# Altium PCB nrf24l01_cell(P40).PcbDoc (part 1 of 11)
Units mm, origin at the board's own origin, x right, y up, seen from the top; angles counter-clockwise.
Board outline 136.2 x 112.2 mm, 2 copper layers (TopLayer, BottomLayer); 520 components, 0 nets, 2804 pads, 1040 vias.
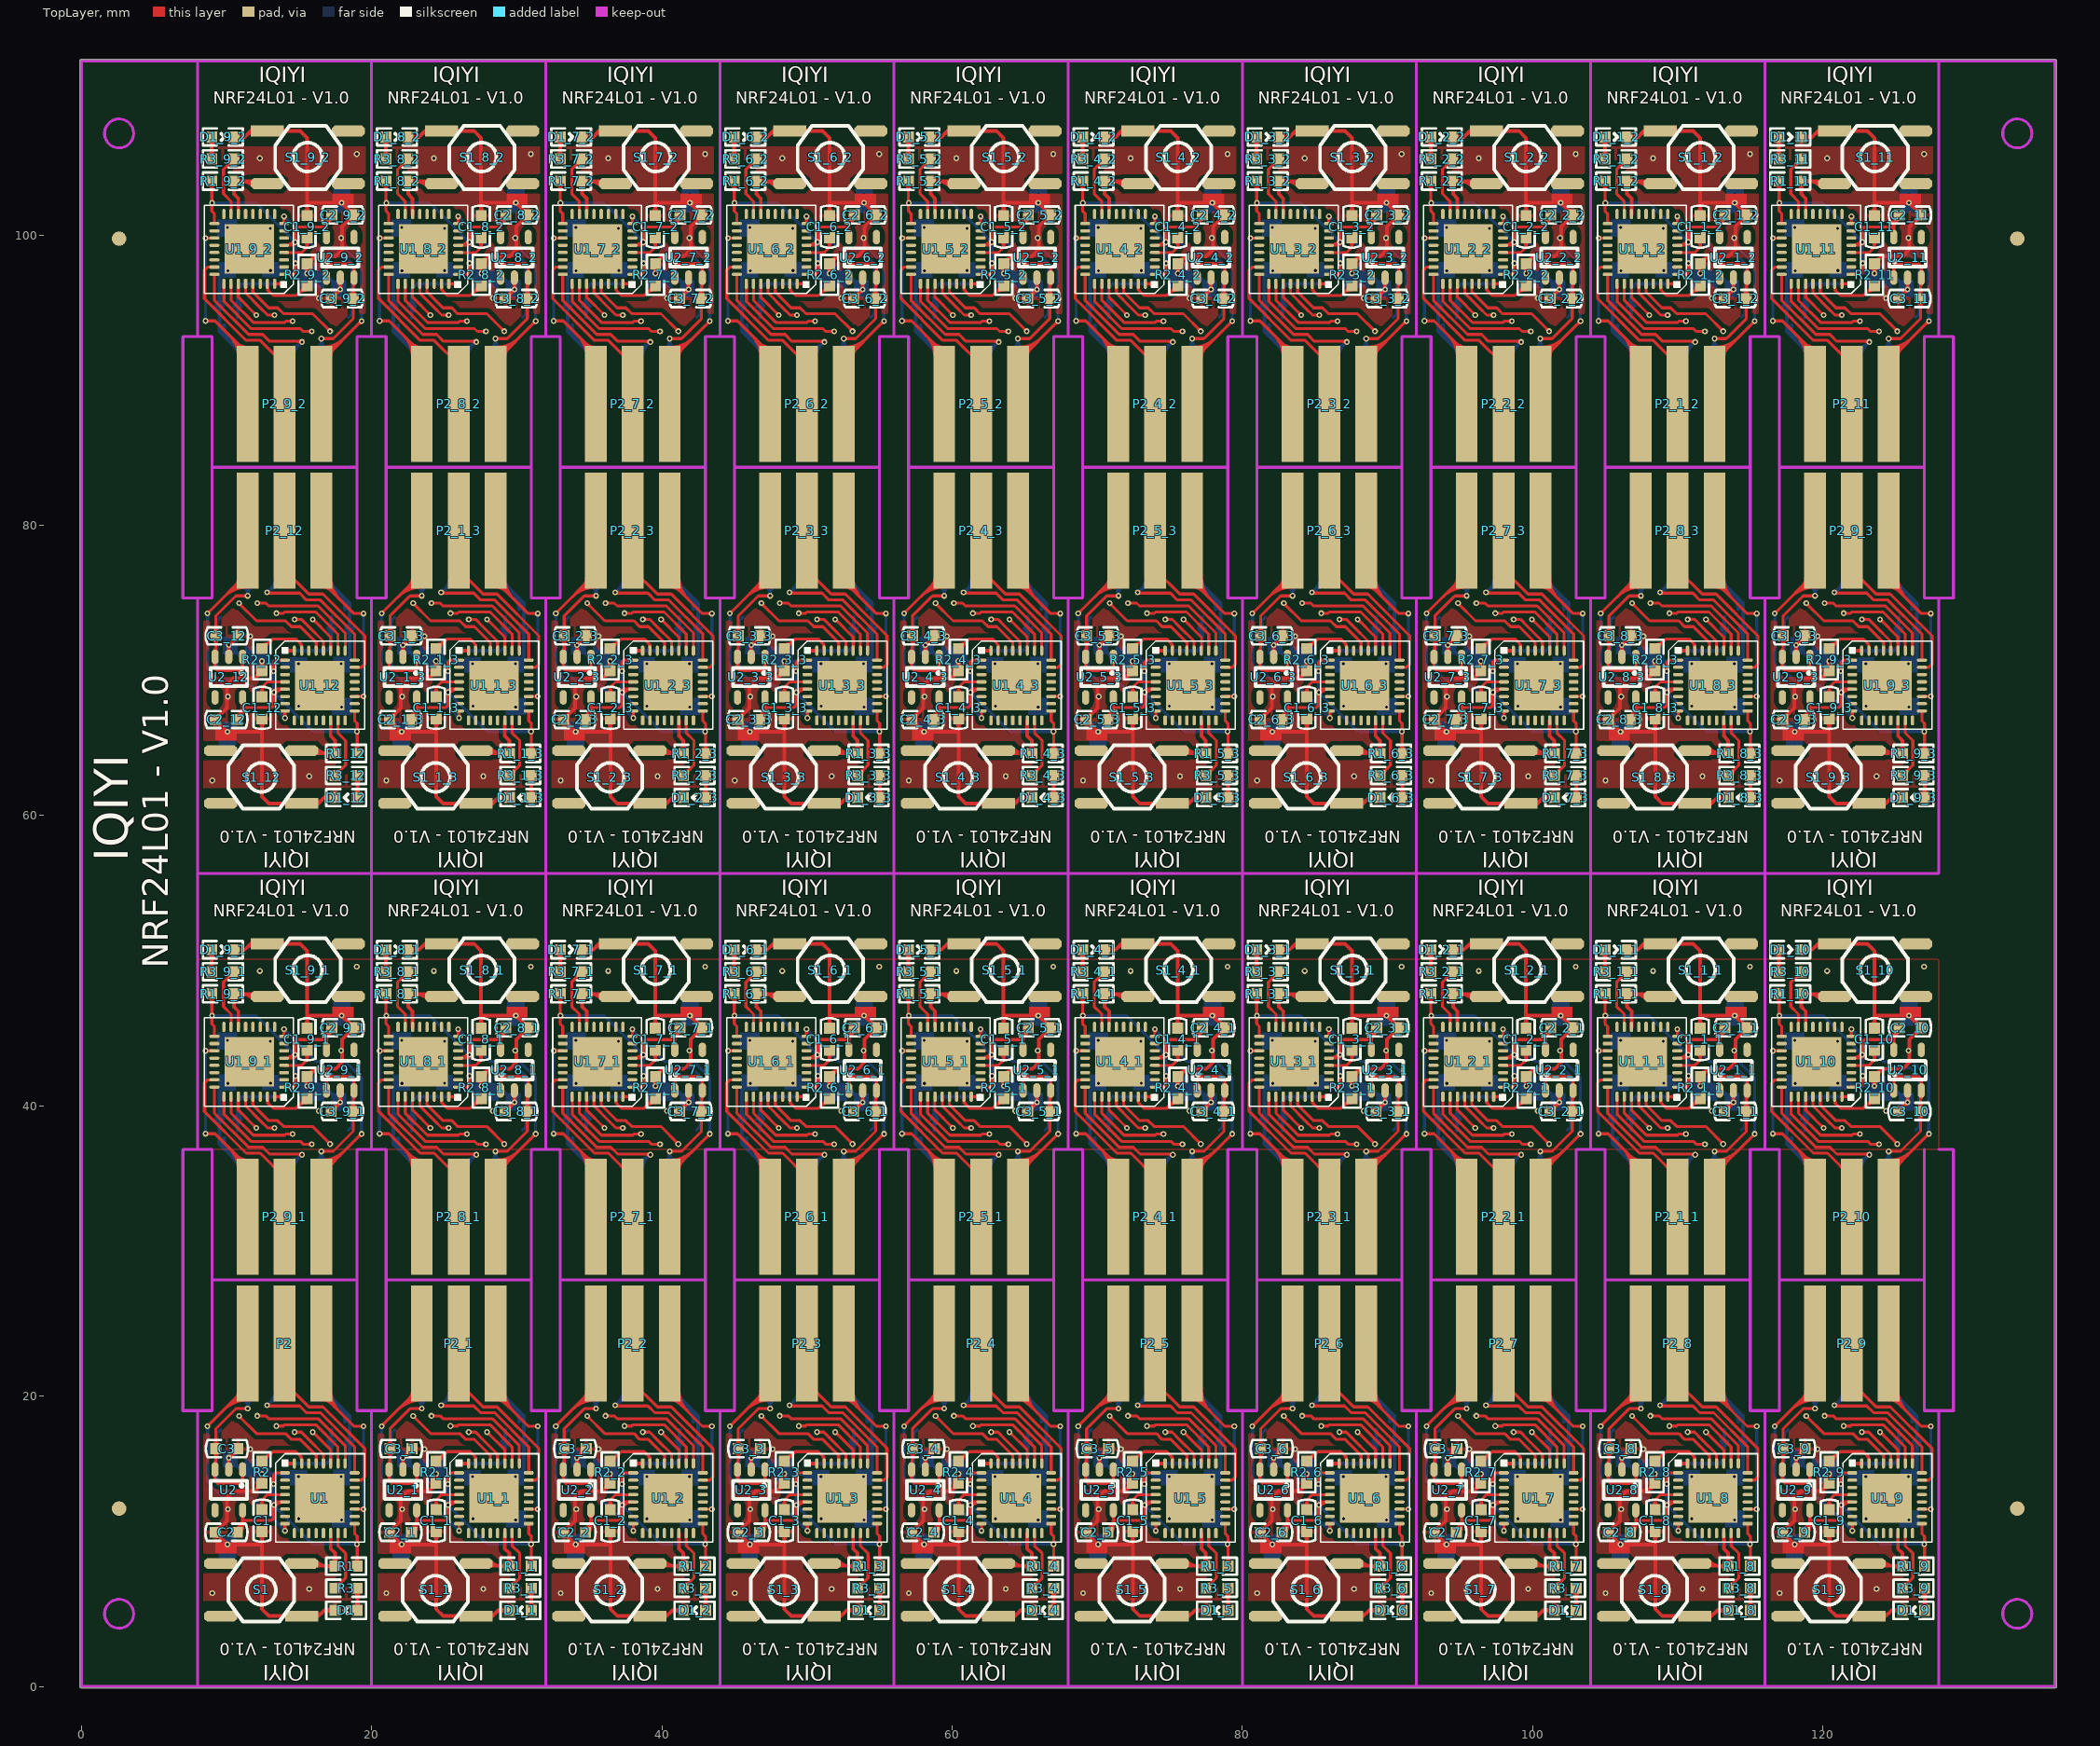
[diagram p0: TopLayer view]
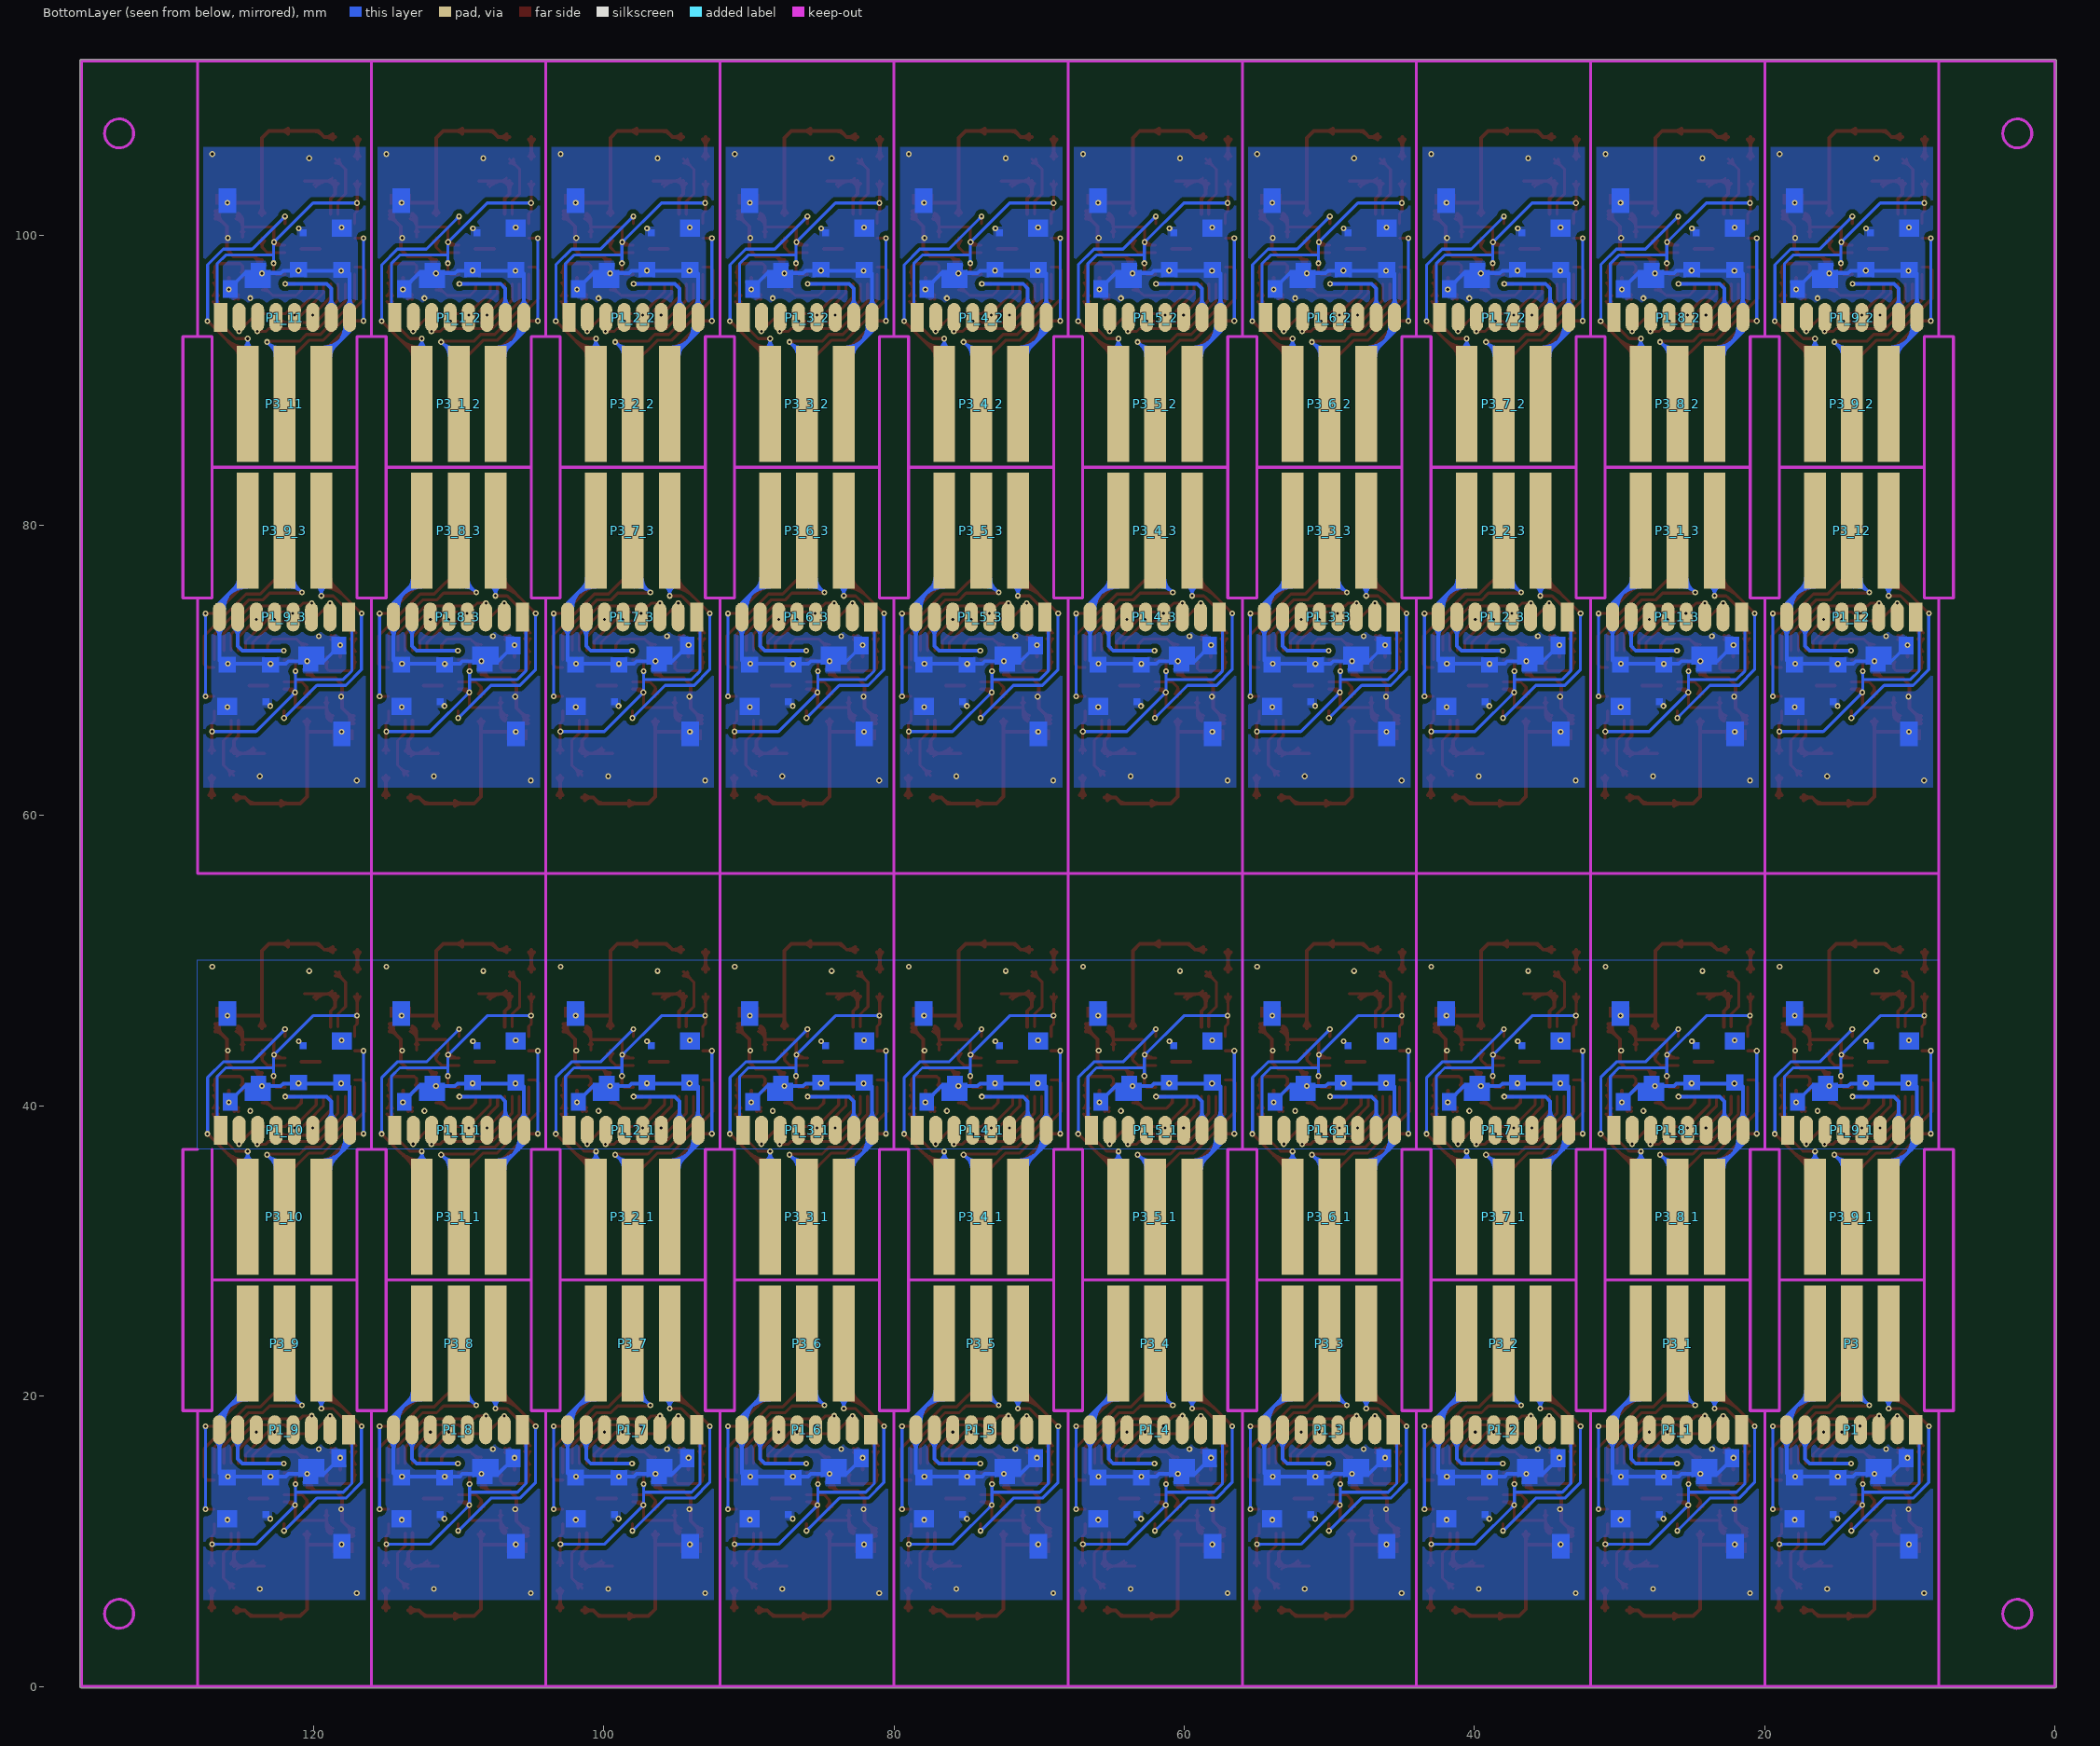
[diagram p1: BottomLayer view, seen from below]

## Layer stack, top to bottom
TopLayer: signal copper 0.0356
Dielectric: prepreg 0.32, FR-4, Dk 4.8
BottomLayer: signal copper 0.0356

## Board outline
-0.071,-0.071 cw(c0,0) -0.1,0 -0.1,112 cw(c0,112) 0,112.1 136,112.1 cw(c136,112) 136.1,112 136.1,0 cw(c136,0) 136.071,-0.071 cw(c136,0) 136,-0.1 ccw(c136,0) 136.071,-0.071 136,-0.1 0,-0.1 cw(c0,0)

## Design rules (kind name [scope] priority, off if disabled: settings)
Clearance Clearance_2 [All] p1 off: gap=0.3
Clearance Clearance_0 [All] p2: gap=0.203
ComponentClearance [All] p1: gap=0.1 collisioncheckmode=3 verticalgap=0.1 showdistances=FALSE
FabricationTestPointUsage TestPointUsage [All] p1: valid=0 allowmultiple=FALSE
FabricationTestpoint Testpoint [All] p1: side=3 testpointundercomponent=TRUE minsize=1.016 maxsize=2.54 preferedsize=1.524 minholesize=0.508 maxholesize=1.016 preferedholesize=0.813 testpointgrid=0.025 allowsidetop=TRUE allowsidebottom=TRUE usegrid=TRUE gridtolerance=0
PolygonConnect [All] p1: connectstyle=Relief reliefconductorwidth=0.254 reliefentries=4 polygonreliefangle="90 Angle"
RoutingVias [All] p1: holewidth=0.4 width=0.8 viastyle="Through Hole" minholewidth=0.2 minwidth=0.406 maxholewidth=0.711 maxwidth=1.27
SilkscreenOverComponentPads [All] p1: minsilkscreentomaskgap=0.254
SolderMaskExpansion [All] p1: expansion=0.102
Width [All] p1: maxlimit=5 minlimit=0.203 preferedwidth=0.203 minimp=50.000000 maximp=50.000000 favimp=50.000000
24 further rules are at their usual default settings.

## Classes and differential pairs
component class nrf24l01_mboard: C1 C2 C3 D1 P1 P2 P3 R1 R2 R3 S1 U1 U2

## Components (designator, comment, footprint, x,y, rotation, side; value= is the part's Value field where it differs from the comment)
C1 "104" 1608(0603C) 12.45,12.18 r270 top
C1_1 "104" 1608(0603C) 24.45,12.18 r270 top (schematic designator C1)
C1_1_1 "104" 1608(0603C) 111.55,43.82 r90 top (schematic designator C1)
C1_1_2 "104" 1608(0603C) 111.55,99.82 r90 top (schematic designator C1)
C1_1_3 "104" 1608(0603C) 24.45,68.18 r270 top (schematic designator C1)
C1_2 "104" 1608(0603C) 36.45,12.18 r270 top (schematic designator C1)
C1_2_1 "104" 1608(0603C) 99.55,43.82 r90 top (schematic designator C1)
C1_2_2 "104" 1608(0603C) 99.55,99.82 r90 top (schematic designator C1)
C1_2_3 "104" 1608(0603C) 36.45,68.18 r270 top (schematic designator C1)
C1_3 "104" 1608(0603C) 48.45,12.18 r270 top (schematic designator C1)
C1_3_1 "104" 1608(0603C) 87.55,43.82 r90 top (schematic designator C1)
C1_3_2 "104" 1608(0603C) 87.55,99.82 r90 top (schematic designator C1)
C1_3_3 "104" 1608(0603C) 48.45,68.18 r270 top (schematic designator C1)
C1_4 "104" 1608(0603C) 60.45,12.18 r270 top (schematic designator C1)
C1_4_1 "104" 1608(0603C) 75.55,43.82 r90 top (schematic designator C1)
C1_4_2 "104" 1608(0603C) 75.55,99.82 r90 top (schematic designator C1)
C1_4_3 "104" 1608(0603C) 60.45,68.18 r270 top (schematic designator C1)
C1_5 "104" 1608(0603C) 72.45,12.18 r270 top (schematic designator C1)
C1_5_1 "104" 1608(0603C) 63.55,43.82 r90 top (schematic designator C1)
C1_5_2 "104" 1608(0603C) 63.55,99.82 r90 top (schematic designator C1)
C1_5_3 "104" 1608(0603C) 72.45,68.18 r270 top (schematic designator C1)
C1_6 "104" 1608(0603C) 84.45,12.18 r270 top (schematic designator C1)
C1_6_1 "104" 1608(0603C) 51.55,43.82 r90 top (schematic designator C1)
C1_6_2 "104" 1608(0603C) 51.55,99.82 r90 top (schematic designator C1)
C1_6_3 "104" 1608(0603C) 84.45,68.18 r270 top (schematic designator C1)
C1_7 "104" 1608(0603C) 96.45,12.18 r270 top (schematic designator C1)
C1_7_1 "104" 1608(0603C) 39.55,43.82 r90 top (schematic designator C1)
C1_7_2 "104" 1608(0603C) 39.55,99.82 r90 top (schematic designator C1)
C1_7_3 "104" 1608(0603C) 96.45,68.18 r270 top (schematic designator C1)
C1_8 "104" 1608(0603C) 108.45,12.18 r270 top (schematic designator C1)
C1_8_1 "104" 1608(0603C) 27.55,43.82 r90 top (schematic designator C1)
C1_8_2 "104" 1608(0603C) 27.55,99.82 r90 top (schematic designator C1)
C1_8_3 "104" 1608(0603C) 108.45,68.18 r270 top (schematic designator C1)
C1_9 "104" 1608(0603C) 120.45,12.18 r270 top (schematic designator C1)
C1_9_1 "104" 1608(0603C) 15.55,43.82 r90 top (schematic designator C1)
C1_9_2 "104" 1608(0603C) 15.55,99.82 r90 top (schematic designator C1)
C1_9_3 "104" 1608(0603C) 120.45,68.18 r270 top (schematic designator C1)
C1_10 "104" 1608(0603C) 123.55,43.82 r90 top (schematic designator C1)
C1_11 "104" 1608(0603C) 123.55,99.82 r90 top (schematic designator C1)
C1_12 "104" 1608(0603C) 12.45,68.18 r270 top (schematic designator C1)
C2 "475" 1608(0603C) 10.75,10.62 r180 top
C2_1 "475" 1608(0603C) 22.75,10.62 r180 top (schematic designator C2)
C2_1_1 "475" 1608(0603C) 113.25,45.38 r0 top (schematic designator C2)
C2_1_2 "475" 1608(0603C) 113.25,101.38 r0 top (schematic designator C2)
C2_1_3 "475" 1608(0603C) 22.75,66.62 r180 top (schematic designator C2)
C2_2 "475" 1608(0603C) 34.75,10.62 r180 top (schematic designator C2)
C2_2_1 "475" 1608(0603C) 101.25,45.38 r0 top (schematic designator C2)
C2_2_2 "475" 1608(0603C) 101.25,101.38 r0 top (schematic designator C2)
C2_2_3 "475" 1608(0603C) 34.75,66.62 r180 top (schematic designator C2)
C2_3 "475" 1608(0603C) 46.75,10.62 r180 top (schematic designator C2)
C2_3_1 "475" 1608(0603C) 89.25,45.38 r0 top (schematic designator C2)
C2_3_2 "475" 1608(0603C) 89.25,101.38 r0 top (schematic designator C2)
C2_3_3 "475" 1608(0603C) 46.75,66.62 r180 top (schematic designator C2)
C2_4 "475" 1608(0603C) 58.75,10.62 r180 top (schematic designator C2)
C2_4_1 "475" 1608(0603C) 77.25,45.38 r0 top (schematic designator C2)
C2_4_2 "475" 1608(0603C) 77.25,101.38 r0 top (schematic designator C2)
C2_4_3 "475" 1608(0603C) 58.75,66.62 r180 top (schematic designator C2)
C2_5 "475" 1608(0603C) 70.75,10.62 r180 top (schematic designator C2)
C2_5_1 "475" 1608(0603C) 65.25,45.38 r0 top (schematic designator C2)
C2_5_2 "475" 1608(0603C) 65.25,101.38 r0 top (schematic designator C2)
C2_5_3 "475" 1608(0603C) 70.75,66.62 r180 top (schematic designator C2)
C2_6 "475" 1608(0603C) 82.75,10.62 r180 top (schematic designator C2)
C2_6_1 "475" 1608(0603C) 53.25,45.38 r0 top (schematic designator C2)
C2_6_2 "475" 1608(0603C) 53.25,101.38 r0 top (schematic designator C2)
C2_6_3 "475" 1608(0603C) 82.75,66.62 r180 top (schematic designator C2)
C2_7 "475" 1608(0603C) 94.75,10.62 r180 top (schematic designator C2)
C2_7_1 "475" 1608(0603C) 41.25,45.38 r0 top (schematic designator C2)
C2_7_2 "475" 1608(0603C) 41.25,101.38 r0 top (schematic designator C2)
C2_7_3 "475" 1608(0603C) 94.75,66.62 r180 top (schematic designator C2)
C2_8 "475" 1608(0603C) 106.75,10.62 r180 top (schematic designator C2)
C2_8_1 "475" 1608(0603C) 29.25,45.38 r0 top (schematic designator C2)
C2_8_2 "475" 1608(0603C) 29.25,101.38 r0 top (schematic designator C2)
C2_8_3 "475" 1608(0603C) 106.75,66.62 r180 top (schematic designator C2)
C2_9 "475" 1608(0603C) 118.75,10.62 r180 top (schematic designator C2)
C2_9_1 "475" 1608(0603C) 17.25,45.38 r0 top (schematic designator C2)
C2_9_2 "475" 1608(0603C) 17.25,101.38 r0 top (schematic designator C2)
C2_9_3 "475" 1608(0603C) 118.75,66.62 r180 top (schematic designator C2)
C2_10 "475" 1608(0603C) 125.25,45.38 r0 top (schematic designator C2)
C2_11 "475" 1608(0603C) 125.25,101.38 r0 top (schematic designator C2)
C2_12 "475" 1608(0603C) 10.75,66.62 r180 top (schematic designator C2)
C3 "104" 1608(0603C) 10.79,16.38 r180 top
C3_1 "104" 1608(0603C) 22.79,16.38 r180 top (schematic designator C3)
C3_1_1 "104" 1608(0603C) 113.21,39.62 r0 top (schematic designator C3)
C3_1_2 "104" 1608(0603C) 113.21,95.62 r0 top (schematic designator C3)
C3_1_3 "104" 1608(0603C) 22.79,72.38 r180 top (schematic designator C3)
C3_2 "104" 1608(0603C) 34.79,16.38 r180 top (schematic designator C3)
C3_2_1 "104" 1608(0603C) 101.21,39.62 r0 top (schematic designator C3)
C3_2_2 "104" 1608(0603C) 101.21,95.62 r0 top (schematic designator C3)
C3_2_3 "104" 1608(0603C) 34.79,72.38 r180 top (schematic designator C3)
C3_3 "104" 1608(0603C) 46.79,16.38 r180 top (schematic designator C3)
C3_3_1 "104" 1608(0603C) 89.21,39.62 r0 top (schematic designator C3)
C3_3_2 "104" 1608(0603C) 89.21,95.62 r0 top (schematic designator C3)
C3_3_3 "104" 1608(0603C) 46.79,72.38 r180 top (schematic designator C3)
C3_4 "104" 1608(0603C) 58.79,16.38 r180 top (schematic designator C3)
C3_4_1 "104" 1608(0603C) 77.21,39.62 r0 top (schematic designator C3)
C3_4_2 "104" 1608(0603C) 77.21,95.62 r0 top (schematic designator C3)
C3_4_3 "104" 1608(0603C) 58.79,72.38 r180 top (schematic designator C3)
C3_5 "104" 1608(0603C) 70.79,16.38 r180 top (schematic designator C3)
C3_5_1 "104" 1608(0603C) 65.21,39.62 r0 top (schematic designator C3)
C3_5_2 "104" 1608(0603C) 65.21,95.62 r0 top (schematic designator C3)
C3_5_3 "104" 1608(0603C) 70.79,72.38 r180 top (schematic designator C3)
C3_6 "104" 1608(0603C) 82.79,16.38 r180 top (schematic designator C3)
C3_6_1 "104" 1608(0603C) 53.21,39.62 r0 top (schematic designator C3)
C3_6_2 "104" 1608(0603C) 53.21,95.62 r0 top (schematic designator C3)
C3_6_3 "104" 1608(0603C) 82.79,72.38 r180 top (schematic designator C3)
C3_7 "104" 1608(0603C) 94.79,16.38 r180 top (schematic designator C3)
C3_7_1 "104" 1608(0603C) 41.21,39.62 r0 top (schematic designator C3)
C3_7_2 "104" 1608(0603C) 41.21,95.62 r0 top (schematic designator C3)
C3_7_3 "104" 1608(0603C) 94.79,72.38 r180 top (schematic designator C3)
C3_8 "104" 1608(0603C) 106.79,16.38 r180 top (schematic designator C3)
C3_8_1 "104" 1608(0603C) 29.21,39.62 r0 top (schematic designator C3)
C3_8_2 "104" 1608(0603C) 29.21,95.62 r0 top (schematic designator C3)
C3_8_3 "104" 1608(0603C) 106.79,72.38 r180 top (schematic designator C3)
C3_9 "104" 1608(0603C) 118.79,16.38 r180 top (schematic designator C3)
C3_9_1 "104" 1608(0603C) 17.21,39.62 r0 top (schematic designator C3)
C3_9_2 "104" 1608(0603C) 17.21,95.62 r0 top (schematic designator C3)
C3_9_3 "104" 1608(0603C) 118.79,72.38 r180 top (schematic designator C3)
C3_10 "104" 1608(0603C) 125.21,39.62 r0 top (schematic designator C3)
C3_11 "104" 1608(0603C) 125.21,95.62 r0 top (schematic designator C3)
C3_12 "104" 1608(0603C) 10.79,72.38 r180 top (schematic designator C3)
D1 "LED_RED" LED-0603R 17.49,5.24 r0 top
D1_1 "LED_RED" LED-0603R 29.49,5.24 r0 top (schematic designator D1)
D1_1_1 "LED_RED" LED-0603R 106.51,50.76 r180 top (schematic designator D1)
D1_1_2 "LED_RED" LED-0603R 106.51,106.76 r180 top (schematic designator D1)
D1_1_3 "LED_RED" LED-0603R 29.49,61.24 r0 top (schematic designator D1)
D1_2 "LED_RED" LED-0603R 41.49,5.24 r0 top (schematic designator D1)
D1_2_1 "LED_RED" LED-0603R 94.51,50.76 r180 top (schematic designator D1)
D1_2_2 "LED_RED" LED-0603R 94.51,106.76 r180 top (schematic designator D1)
D1_2_3 "LED_RED" LED-0603R 41.49,61.24 r0 top (schematic designator D1)
D1_3 "LED_RED" LED-0603R 53.49,5.24 r0 top (schematic designator D1)
D1_3_1 "LED_RED" LED-0603R 82.51,50.76 r180 top (schematic designator D1)
D1_3_2 "LED_RED" LED-0603R 82.51,106.76 r180 top (schematic designator D1)
D1_3_3 "LED_RED" LED-0603R 53.49,61.24 r0 top (schematic designator D1)
D1_4 "LED_RED" LED-0603R 65.49,5.24 r0 top (schematic designator D1)
D1_4_1 "LED_RED" LED-0603R 70.51,50.76 r180 top (schematic designator D1)
D1_4_2 "LED_RED" LED-0603R 70.51,106.76 r180 top (schematic designator D1)
D1_4_3 "LED_RED" LED-0603R 65.49,61.24 r0 top (schematic designator D1)
D1_5 "LED_RED" LED-0603R 77.49,5.24 r0 top (schematic designator D1)
D1_5_1 "LED_RED" LED-0603R 58.51,50.76 r180 top (schematic designator D1)
D1_5_2 "LED_RED" LED-0603R 58.51,106.76 r180 top (schematic designator D1)
D1_5_3 "LED_RED" LED-0603R 77.49,61.24 r0 top (schematic designator D1)
D1_6 "LED_RED" LED-0603R 89.49,5.24 r0 top (schematic designator D1)
D1_6_1 "LED_RED" LED-0603R 46.51,50.76 r180 top (schematic designator D1)
D1_6_2 "LED_RED" LED-0603R 46.51,106.76 r180 top (schematic designator D1)
D1_6_3 "LED_RED" LED-0603R 89.49,61.24 r0 top (schematic designator D1)
D1_7 "LED_RED" LED-0603R 101.49,5.24 r0 top (schematic designator D1)
D1_7_1 "LED_RED" LED-0603R 34.51,50.76 r180 top (schematic designator D1)
D1_7_2 "LED_RED" LED-0603R 34.51,106.76 r180 top (schematic designator D1)
D1_7_3 "LED_RED" LED-0603R 101.49,61.24 r0 top (schematic designator D1)
D1_8 "LED_RED" LED-0603R 113.49,5.24 r0 top (schematic designator D1)
D1_8_1 "LED_RED" LED-0603R 22.51,50.76 r180 top (schematic designator D1)
D1_8_2 "LED_RED" LED-0603R 22.51,106.76 r180 top (schematic designator D1)
D1_8_3 "LED_RED" LED-0603R 113.49,61.24 r0 top (schematic designator D1)
D1_9 "LED_RED" LED-0603R 125.49,5.24 r0 top (schematic designator D1)
D1_9_1 "LED_RED" LED-0603R 10.51,50.76 r180 top (schematic designator D1)
D1_9_2 "LED_RED" LED-0603R 10.51,106.76 r180 top (schematic designator D1)
D1_9_3 "LED_RED" LED-0603R 125.49,61.24 r0 top (schematic designator D1)
D1_10 "LED_RED" LED-0603R 118.51,50.76 r180 top (schematic designator D1)
D1_11 "LED_RED" LED-0603R 118.51,106.76 r180 top (schematic designator D1)
D1_12 "LED_RED" LED-0603R 17.49,61.24 r0 top (schematic designator D1)
P1 "NRF24L01" SSSIP8X_N 9.6,17.68 r270 bottom
P1_1 "NRF24L01" SSSIP8X_N 21.6,17.68 r270 bottom (schematic designator P1)
P1_1_1 "NRF24L01" SSSIP8X_N 114.4,38.32 r90 bottom (schematic designator P1)
P1_1_2 "NRF24L01" SSSIP8X_N 114.4,94.32 r90 bottom (schematic designator P1)
P1_1_3 "NRF24L01" SSSIP8X_N 21.6,73.68 r270 bottom (schematic designator P1)
P1_2 "NRF24L01" SSSIP8X_N 33.6,17.68 r270 bottom (schematic designator P1)
P1_2_1 "NRF24L01" SSSIP8X_N 102.4,38.32 r90 bottom (schematic designator P1)
P1_2_2 "NRF24L01" SSSIP8X_N 102.4,94.32 r90 bottom (schematic designator P1)
P1_2_3 "NRF24L01" SSSIP8X_N 33.6,73.68 r270 bottom (schematic designator P1)
P1_3 "NRF24L01" SSSIP8X_N 45.6,17.68 r270 bottom (schematic designator P1)
P1_3_1 "NRF24L01" SSSIP8X_N 90.4,38.32 r90 bottom (schematic designator P1)
P1_3_2 "NRF24L01" SSSIP8X_N 90.4,94.32 r90 bottom (schematic designator P1)
P1_3_3 "NRF24L01" SSSIP8X_N 45.6,73.68 r270 bottom (schematic designator P1)
P1_4 "NRF24L01" SSSIP8X_N 57.6,17.68 r270 bottom (schematic designator P1)
P1_4_1 "NRF24L01" SSSIP8X_N 78.4,38.32 r90 bottom (schematic designator P1)
P1_4_2 "NRF24L01" SSSIP8X_N 78.4,94.32 r90 bottom (schematic designator P1)
P1_4_3 "NRF24L01" SSSIP8X_N 57.6,73.68 r270 bottom (schematic designator P1)
P1_5 "NRF24L01" SSSIP8X_N 69.6,17.68 r270 bottom (schematic designator P1)
P1_5_1 "NRF24L01" SSSIP8X_N 66.4,38.32 r90 bottom (schematic designator P1)
P1_5_2 "NRF24L01" SSSIP8X_N 66.4,94.32 r90 bottom (schematic designator P1)
P1_5_3 "NRF24L01" SSSIP8X_N 69.6,73.68 r270 bottom (schematic designator P1)
P1_6 "NRF24L01" SSSIP8X_N 81.6,17.68 r270 bottom (schematic designator P1)
P1_6_1 "NRF24L01" SSSIP8X_N 54.4,38.32 r90 bottom (schematic designator P1)
P1_6_2 "NRF24L01" SSSIP8X_N 54.4,94.32 r90 bottom (schematic designator P1)
P1_6_3 "NRF24L01" SSSIP8X_N 81.6,73.68 r270 bottom (schematic designator P1)
P1_7 "NRF24L01" SSSIP8X_N 93.6,17.68 r270 bottom (schematic designator P1)
P1_7_1 "NRF24L01" SSSIP8X_N 42.4,38.32 r90 bottom (schematic designator P1)
P1_7_2 "NRF24L01" SSSIP8X_N 42.4,94.32 r90 bottom (schematic designator P1)
P1_7_3 "NRF24L01" SSSIP8X_N 93.6,73.68 r270 bottom (schematic designator P1)
P1_8 "NRF24L01" SSSIP8X_N 105.6,17.68 r270 bottom (schematic designator P1)
P1_8_1 "NRF24L01" SSSIP8X_N 30.4,38.32 r90 bottom (schematic designator P1)
P1_8_2 "NRF24L01" SSSIP8X_N 30.4,94.32 r90 bottom (schematic designator P1)
P1_8_3 "NRF24L01" SSSIP8X_N 105.6,73.68 r270 bottom (schematic designator P1)
P1_9 "NRF24L01" SSSIP8X_N 117.6,17.68 r270 bottom (schematic designator P1)
P1_9_1 "NRF24L01" SSSIP8X_N 18.4,38.32 r90 bottom (schematic designator P1)
P1_9_2 "NRF24L01" SSSIP8X_N 18.4,94.32 r90 bottom (schematic designator P1)
P1_9_3 "NRF24L01" SSSIP8X_N 117.6,73.68 r270 bottom (schematic designator P1)
P1_10 "NRF24L01" SSSIP8X_N 126.4,38.32 r90 bottom (schematic designator P1)
P1_11 "NRF24L01" SSSIP8X_N 126.4,94.32 r90 bottom (schematic designator P1)
P1_12 "NRF24L01" SSSIP8X_N 9.6,73.68 r270 bottom (schematic designator P1)
P2 "" SIPP3X 16.54,23.63 r180 top
P2_1 "" SIPP3X 28.54,23.63 r180 top (schematic designator P2)
P2_1_1 "" SIPP3X 107.46,32.37 r0 top (schematic designator P2)
P2_1_2 "" SIPP3X 107.46,88.37 r0 top (schematic designator P2)
P2_1_3 "" SIPP3X 28.54,79.63 r180 top (schematic designator P2)
P2_2 "" SIPP3X 40.54,23.63 r180 top (schematic designator P2)
P2_2_1 "" SIPP3X 95.46,32.37 r0 top (schematic designator P2)
P2_2_2 "" SIPP3X 95.46,88.37 r0 top (schematic designator P2)
P2_2_3 "" SIPP3X 40.54,79.63 r180 top (schematic designator P2)
P2_3 "" SIPP3X 52.54,23.63 r180 top (schematic designator P2)
P2_3_1 "" SIPP3X 83.46,32.37 r0 top (schematic designator P2)
P2_3_2 "" SIPP3X 83.46,88.37 r0 top (schematic designator P2)
P2_3_3 "" SIPP3X 52.54,79.63 r180 top (schematic designator P2)
P2_4 "" SIPP3X 64.54,23.63 r180 top (schematic designator P2)
P2_4_1 "" SIPP3X 71.46,32.37 r0 top (schematic designator P2)
P2_4_2 "" SIPP3X 71.46,88.37 r0 top (schematic designator P2)
P2_4_3 "" SIPP3X 64.54,79.63 r180 top (schematic designator P2)
P2_5 "" SIPP3X 76.54,23.63 r180 top (schematic designator P2)
P2_5_1 "" SIPP3X 59.46,32.37 r0 top (schematic designator P2)
P2_5_2 "" SIPP3X 59.46,88.37 r0 top (schematic designator P2)
P2_5_3 "" SIPP3X 76.54,79.63 r180 top (schematic designator P2)
P2_6 "" SIPP3X 88.54,23.63 r180 top (schematic designator P2)
P2_6_1 "" SIPP3X 47.46,32.37 r0 top (schematic designator P2)
P2_6_2 "" SIPP3X 47.46,88.37 r0 top (schematic designator P2)
P2_6_3 "" SIPP3X 88.54,79.63 r180 top (schematic designator P2)
P2_7 "" SIPP3X 100.54,23.63 r180 top (schematic designator P2)
P2_7_1 "" SIPP3X 35.46,32.37 r0 top (schematic designator P2)
P2_7_2 "" SIPP3X 35.46,88.37 r0 top (schematic designator P2)
P2_7_3 "" SIPP3X 100.54,79.63 r180 top (schematic designator P2)
P2_8 "" SIPP3X 112.54,23.63 r180 top (schematic designator P2)
P2_8_1 "" SIPP3X 23.46,32.37 r0 top (schematic designator P2)
P2_8_2 "" SIPP3X 23.46,88.37 r0 top (schematic designator P2)
P2_8_3 "" SIPP3X 112.54,79.63 r180 top (schematic designator P2)
P2_9 "" SIPP3X 124.54,23.63 r180 top (schematic designator P2)
P2_9_1 "" SIPP3X 11.46,32.37 r0 top (schematic designator P2)
P2_9_2 "" SIPP3X 11.46,88.37 r0 top (schematic designator P2)
P2_9_3 "" SIPP3X 124.54,79.63 r180 top (schematic designator P2)
P2_10 "" SIPP3X 119.46,32.37 r0 top (schematic designator P2)
P2_11 "" SIPP3X 119.46,88.37 r0 top (schematic designator P2)
P2_12 "" SIPP3X 16.54,79.63 r180 top (schematic designator P2)
P3 "" SIPP3X 16.54,23.63 r180 bottom
P3_1 "" SIPP3X 28.54,23.63 r180 bottom (schematic designator P3)
P3_1_1 "" SIPP3X 107.46,32.37 r0 bottom (schematic designator P3)
P3_1_2 "" SIPP3X 107.46,88.37 r0 bottom (schematic designator P3)
P3_1_3 "" SIPP3X 28.54,79.63 r180 bottom (schematic designator P3)
P3_2 "" SIPP3X 40.54,23.63 r180 bottom (schematic designator P3)
P3_2_1 "" SIPP3X 95.46,32.37 r0 bottom (schematic designator P3)
P3_2_2 "" SIPP3X 95.46,88.37 r0 bottom (schematic designator P3)
P3_2_3 "" SIPP3X 40.54,79.63 r180 bottom (schematic designator P3)
P3_3 "" SIPP3X 52.54,23.63 r180 bottom (schematic designator P3)
P3_3_1 "" SIPP3X 83.46,32.37 r0 bottom (schematic designator P3)
P3_3_2 "" SIPP3X 83.46,88.37 r0 bottom (schematic designator P3)
P3_3_3 "" SIPP3X 52.54,79.63 r180 bottom (schematic designator P3)
P3_4 "" SIPP3X 64.54,23.63 r180 bottom (schematic designator P3)
P3_4_1 "" SIPP3X 71.46,32.37 r0 bottom (schematic designator P3)
P3_4_2 "" SIPP3X 71.46,88.37 r0 bottom (schematic designator P3)
P3_4_3 "" SIPP3X 64.54,79.63 r180 bottom (schematic designator P3)
P3_5 "" SIPP3X 76.54,23.63 r180 bottom (schematic designator P3)
P3_5_1 "" SIPP3X 59.46,32.37 r0 bottom (schematic designator P3)
P3_5_2 "" SIPP3X 59.46,88.37 r0 bottom (schematic designator P3)
P3_5_3 "" SIPP3X 76.54,79.63 r180 bottom (schematic designator P3)
P3_6 "" SIPP3X 88.54,23.63 r180 bottom (schematic designator P3)
P3_6_1 "" SIPP3X 47.46,32.37 r0 bottom (schematic designator P3)
P3_6_2 "" SIPP3X 47.46,88.37 r0 bottom (schematic designator P3)
P3_6_3 "" SIPP3X 88.54,79.63 r180 bottom (schematic designator P3)
P3_7 "" SIPP3X 100.54,23.63 r180 bottom (schematic designator P3)
P3_7_1 "" SIPP3X 35.46,32.37 r0 bottom (schematic designator P3)
P3_7_2 "" SIPP3X 35.46,88.37 r0 bottom (schematic designator P3)
P3_7_3 "" SIPP3X 100.54,79.63 r180 bottom (schematic designator P3)
P3_8 "" SIPP3X 112.54,23.63 r180 bottom (schematic designator P3)
P3_8_1 "" SIPP3X 23.46,32.37 r0 bottom (schematic designator P3)
P3_8_2 "" SIPP3X 23.46,88.37 r0 bottom (schematic designator P3)
P3_8_3 "" SIPP3X 112.54,79.63 r180 bottom (schematic designator P3)
P3_9 "" SIPP3X 124.54,23.63 r180 bottom (schematic designator P3)
P3_9_1 "" SIPP3X 11.46,32.37 r0 bottom (schematic designator P3)
P3_9_2 "" SIPP3X 11.46,88.37 r0 bottom (schematic designator P3)
P3_9_3 "" SIPP3X 124.54,79.63 r180 bottom (schematic designator P3)
P3_10 "" SIPP3X 119.46,32.37 r0 bottom (schematic designator P3)
P3_11 "" SIPP3X 119.46,88.37 r0 bottom (schematic designator P3)
P3_12 "" SIPP3X 16.54,79.63 r180 bottom (schematic designator P3)
R1 "10K" 1608(0603R) 19.01,8.28 r180 top
R1_1 "10K" 1608(0603R) 31.01,8.28 r180 top (schematic designator R1)
R1_1_1 "10K" 1608(0603R) 104.99,47.72 r0 top (schematic designator R1)
R1_1_2 "10K" 1608(0603R) 104.99,103.72 r0 top (schematic designator R1)
R1_1_3 "10K" 1608(0603R) 31.01,64.28 r180 top (schematic designator R1)
R1_2 "10K" 1608(0603R) 43.01,8.28 r180 top (schematic designator R1)
R1_2_1 "10K" 1608(0603R) 92.99,47.72 r0 top (schematic designator R1)
R1_2_2 "10K" 1608(0603R) 92.99,103.72 r0 top (schematic designator R1)
R1_2_3 "10K" 1608(0603R) 43.01,64.28 r180 top (schematic designator R1)
R1_3 "10K" 1608(0603R) 55.01,8.28 r180 top (schematic designator R1)
R1_3_1 "10K" 1608(0603R) 80.99,47.72 r0 top (schematic designator R1)
R1_3_2 "10K" 1608(0603R) 80.99,103.72 r0 top (schematic designator R1)
R1_3_3 "10K" 1608(0603R) 55.01,64.28 r180 top (schematic designator R1)
R1_4 "10K" 1608(0603R) 67.01,8.28 r180 top (schematic designator R1)
R1_4_1 "10K" 1608(0603R) 68.99,47.72 r0 top (schematic designator R1)
R1_4_2 "10K" 1608(0603R) 68.99,103.72 r0 top (schematic designator R1)
R1_4_3 "10K" 1608(0603R) 67.01,64.28 r180 top (schematic designator R1)
R1_5 "10K" 1608(0603R) 79.01,8.28 r180 top (schematic designator R1)
R1_5_1 "10K" 1608(0603R) 56.99,47.72 r0 top (schematic designator R1)
R1_5_2 "10K" 1608(0603R) 56.99,103.72 r0 top (schematic designator R1)
R1_5_3 "10K" 1608(0603R) 79.01,64.28 r180 top (schematic designator R1)
R1_6 "10K" 1608(0603R) 91.01,8.28 r180 top (schematic designator R1)
R1_6_1 "10K" 1608(0603R) 44.99,47.72 r0 top (schematic designator R1)
R1_6_2 "10K" 1608(0603R) 44.99,103.72 r0 top (schematic designator R1)
R1_6_3 "10K" 1608(0603R) 91.01,64.28 r180 top (schematic designator R1)
R1_7 "10K" 1608(0603R) 103.01,8.28 r180 top (schematic designator R1)
R1_7_1 "10K" 1608(0603R) 32.99,47.72 r0 top (schematic designator R1)
R1_7_2 "10K" 1608(0603R) 32.99,103.72 r0 top (schematic designator R1)
R1_7_3 "10K" 1608(0603R) 103.01,64.28 r180 top (schematic designator R1)
R1_8 "10K" 1608(0603R) 115.01,8.28 r180 top (schematic designator R1)
R1_8_1 "10K" 1608(0603R) 20.99,47.72 r0 top (schematic designator R1)
R1_8_2 "10K" 1608(0603R) 20.99,103.72 r0 top (schematic designator R1)
R1_8_3 "10K" 1608(0603R) 115.01,64.28 r180 top (schematic designator R1)
R1_9 "10K" 1608(0603R) 127.01,8.28 r180 top (schematic designator R1)
R1_9_1 "10K" 1608(0603R) 8.99,47.72 r0 top (schematic designator R1)
R1_9_2 "10K" 1608(0603R) 8.99,103.72 r0 top (schematic designator R1)
R1_9_3 "10K" 1608(0603R) 127.01,64.28 r180 top (schematic designator R1)
R1_10 "10K" 1608(0603R) 116.99,47.72 r0 top (schematic designator R1)
R1_11 "10K" 1608(0603R) 116.99,103.72 r0 top (schematic designator R1)
R1_12 "10K" 1608(0603R) 19.01,64.28 r180 top (schematic designator R1)
R2 "10K" 1608(0603r) 12.44,15.51 r270 top
R2_1 "10K" 1608(0603r) 24.44,15.51 r270 top (schematic designator R2)
R2_1_1 "10K" 1608(0603r) 111.56,40.49 r90 top (schematic designator R2)
R2_1_2 "10K" 1608(0603r) 111.56,96.49 r90 top (schematic designator R2)
R2_1_3 "10K" 1608(0603r) 24.44,71.51 r270 top (schematic designator R2)
R2_2 "10K" 1608(0603r) 36.44,15.51 r270 top (schematic designator R2)
R2_2_1 "10K" 1608(0603r) 99.56,40.49 r90 top (schematic designator R2)
R2_2_2 "10K" 1608(0603r) 99.56,96.49 r90 top (schematic designator R2)
R2_2_3 "10K" 1608(0603r) 36.44,71.51 r270 top (schematic designator R2)
R2_3 "10K" 1608(0603r) 48.44,15.51 r270 top (schematic designator R2)
R2_3_1 "10K" 1608(0603r) 87.56,40.49 r90 top (schematic designator R2)
R2_3_2 "10K" 1608(0603r) 87.56,96.49 r90 top (schematic designator R2)
R2_3_3 "10K" 1608(0603r) 48.44,71.51 r270 top (schematic designator R2)
R2_4 "10K" 1608(0603r) 60.44,15.51 r270 top (schematic designator R2)
R2_4_1 "10K" 1608(0603r) 75.56,40.49 r90 top (schematic designator R2)
R2_4_2 "10K" 1608(0603r) 75.56,96.49 r90 top (schematic designator R2)
R2_4_3 "10K" 1608(0603r) 60.44,71.51 r270 top (schematic designator R2)
R2_5 "10K" 1608(0603r) 72.44,15.51 r270 top (schematic designator R2)
R2_5_1 "10K" 1608(0603r) 63.56,40.49 r90 top (schematic designator R2)
R2_5_2 "10K" 1608(0603r) 63.56,96.49 r90 top (schematic designator R2)
R2_5_3 "10K" 1608(0603r) 72.44,71.51 r270 top (schematic designator R2)
R2_6 "10K" 1608(0603r) 84.44,15.51 r270 top (schematic designator R2)
R2_6_1 "10K" 1608(0603r) 51.56,40.49 r90 top (schematic designator R2)
R2_6_2 "10K" 1608(0603r) 51.56,96.49 r90 top (schematic designator R2)
R2_6_3 "10K" 1608(0603r) 84.44,71.51 r270 top (schematic designator R2)
R2_7 "10K" 1608(0603r) 96.44,15.51 r270 top (schematic designator R2)
R2_7_1 "10K" 1608(0603r) 39.56,40.49 r90 top (schematic designator R2)
R2_7_2 "10K" 1608(0603r) 39.56,96.49 r90 top (schematic designator R2)
R2_7_3 "10K" 1608(0603r) 96.44,71.51 r270 top (schematic designator R2)
R2_8 "10K" 1608(0603r) 108.44,15.51 r270 top (schematic designator R2)
R2_8_1 "10K" 1608(0603r) 27.56,40.49 r90 top (schematic designator R2)
R2_8_2 "10K" 1608(0603r) 27.56,96.49 r90 top (schematic designator R2)
R2_8_3 "10K" 1608(0603r) 108.44,71.51 r270 top (schematic designator R2)
R2_9 "10K" 1608(0603r) 120.44,15.51 r270 top (schematic designator R2)
R2_9_1 "10K" 1608(0603r) 15.56,40.49 r90 top (schematic designator R2)
R2_9_2 "10K" 1608(0603r) 15.56,96.49 r90 top (schematic designator R2)
R2_9_3 "10K" 1608(0603r) 120.44,71.51 r270 top (schematic designator R2)
R2_10 "10K" 1608(0603r) 123.56,40.49 r90 top (schematic designator R2)
R2_11 "10K" 1608(0603r) 123.56,96.49 r90 top (schematic designator R2)
R2_12 "10K" 1608(0603r) 12.44,71.51 r270 top (schematic designator R2)
R3 "1K" 1608(0603R) 17.49,6.76 r0 top
R3_1 "1K" 1608(0603R) 29.49,6.76 r0 top (schematic designator R3)
R3_1_1 "1K" 1608(0603R) 106.51,49.24 r180 top (schematic designator R3)
R3_1_2 "1K" 1608(0603R) 106.51,105.24 r180 top (schematic designator R3)
R3_1_3 "1K" 1608(0603R) 29.49,62.76 r0 top (schematic designator R3)
R3_2 "1K" 1608(0603R) 41.49,6.76 r0 top (schematic designator R3)
R3_2_1 "1K" 1608(0603R) 94.51,49.24 r180 top (schematic designator R3)
R3_2_2 "1K" 1608(0603R) 94.51,105.24 r180 top (schematic designator R3)
R3_2_3 "1K" 1608(0603R) 41.49,62.76 r0 top (schematic designator R3)
R3_3 "1K" 1608(0603R) 53.49,6.76 r0 top (schematic designator R3)
R3_3_1 "1K" 1608(0603R) 82.51,49.24 r180 top (schematic designator R3)
R3_3_2 "1K" 1608(0603R) 82.51,105.24 r180 top (schematic designator R3)
R3_3_3 "1K" 1608(0603R) 53.49,62.76 r0 top (schematic designator R3)
R3_4 "1K" 1608(0603R) 65.49,6.76 r0 top (schematic designator R3)
R3_4_1 "1K" 1608(0603R) 70.51,49.24 r180 top (schematic designator R3)
R3_4_2 "1K" 1608(0603R) 70.51,105.24 r180 top (schematic designator R3)
R3_4_3 "1K" 1608(0603R) 65.49,62.76 r0 top (schematic designator R3)
R3_5 "1K" 1608(0603R) 77.49,6.76 r0 top (schematic designator R3)
R3_5_1 "1K" 1608(0603R) 58.51,49.24 r180 top (schematic designator R3)
R3_5_2 "1K" 1608(0603R) 58.51,105.24 r180 top (schematic designator R3)
R3_5_3 "1K" 1608(0603R) 77.49,62.76 r0 top (schematic designator R3)
R3_6 "1K" 1608(0603R) 89.49,6.76 r0 top (schematic designator R3)
R3_6_1 "1K" 1608(0603R) 46.51,49.24 r180 top (schematic designator R3)
R3_6_2 "1K" 1608(0603R) 46.51,105.24 r180 top (schematic designator R3)
R3_6_3 "1K" 1608(0603R) 89.49,62.76 r0 top (schematic designator R3)
R3_7 "1K" 1608(0603R) 101.49,6.76 r0 top (schematic designator R3)
R3_7_1 "1K" 1608(0603R) 34.51,49.24 r180 top (schematic designator R3)
R3_7_2 "1K" 1608(0603R) 34.51,105.24 r180 top (schematic designator R3)
R3_7_3 "1K" 1608(0603R) 101.49,62.76 r0 top (schematic designator R3)
R3_8 "1K" 1608(0603R) 113.49,6.76 r0 top (schematic designator R3)
R3_8_1 "1K" 1608(0603R) 22.51,49.24 r180 top (schematic designator R3)
R3_8_2 "1K" 1608(0603R) 22.51,105.24 r180 top (schematic designator R3)
R3_8_3 "1K" 1608(0603R) 113.49,62.76 r0 top (schematic designator R3)
R3_9 "1K" 1608(0603R) 125.49,6.76 r0 top (schematic designator R3)
R3_9_1 "1K" 1608(0603R) 10.51,49.24 r180 top (schematic designator R3)
R3_9_2 "1K" 1608(0603R) 10.51,105.24 r180 top (schematic designator R3)
R3_9_3 "1K" 1608(0603R) 125.49,62.76 r0 top (schematic designator R3)
R3_10 "1K" 1608(0603R) 118.51,49.24 r180 top (schematic designator R3)
R3_11 "1K" 1608(0603R) 118.51,105.24 r180 top (schematic designator R3)
R3_12 "1K" 1608(0603R) 17.49,62.76 r0 top (schematic designator R3)
S1 "SW-PB" KEY-3 15.19,4.84 r180 top
S1_1 "SW-PB" KEY-3 27.19,4.84 r180 top (schematic designator S1)
S1_1_1 "SW-PB" KEY-3 108.81,51.16 r0 top (schematic designator S1)
S1_1_2 "SW-PB" KEY-3 108.81,107.16 r0 top (schematic designator S1)
S1_1_3 "SW-PB" KEY-3 27.19,60.84 r180 top (schematic designator S1)
S1_2 "SW-PB" KEY-3 39.19,4.84 r180 top (schematic designator S1)
S1_2_1 "SW-PB" KEY-3 96.81,51.16 r0 top (schematic designator S1)
S1_2_2 "SW-PB" KEY-3 96.81,107.16 r0 top (schematic designator S1)
S1_2_3 "SW-PB" KEY-3 39.19,60.84 r180 top (schematic designator S1)
S1_3 "SW-PB" KEY-3 51.19,4.84 r180 top (schematic designator S1)
S1_3_1 "SW-PB" KEY-3 84.81,51.16 r0 top (schematic designator S1)
S1_3_2 "SW-PB" KEY-3 84.81,107.16 r0 top (schematic designator S1)
S1_3_3 "SW-PB" KEY-3 51.19,60.84 r180 top (schematic designator S1)
S1_4 "SW-PB" KEY-3 63.19,4.84 r180 top (schematic designator S1)
S1_4_1 "SW-PB" KEY-3 72.81,51.16 r0 top (schematic designator S1)
S1_4_2 "SW-PB" KEY-3 72.81,107.16 r0 top (schematic designator S1)
S1_4_3 "SW-PB" KEY-3 63.19,60.84 r180 top (schematic designator S1)
S1_5 "SW-PB" KEY-3 75.19,4.84 r180 top (schematic designator S1)
S1_5_1 "SW-PB" KEY-3 60.81,51.16 r0 top (schematic designator S1)
S1_5_2 "SW-PB" KEY-3 60.81,107.16 r0 top (schematic designator S1)
S1_5_3 "SW-PB" KEY-3 75.19,60.84 r180 top (schematic designator S1)
S1_6 "SW-PB" KEY-3 87.19,4.84 r180 top (schematic designator S1)
S1_6_1 "SW-PB" KEY-3 48.81,51.16 r0 top (schematic designator S1)
S1_6_2 "SW-PB" KEY-3 48.81,107.16 r0 top (schematic designator S1)
S1_6_3 "SW-PB" KEY-3 87.19,60.84 r180 top (schematic designator S1)
S1_7 "SW-PB" KEY-3 99.19,4.84 r180 top (schematic designator S1)
S1_7_1 "SW-PB" KEY-3 36.81,51.16 r0 top (schematic designator S1)
S1_7_2 "SW-PB" KEY-3 36.81,107.16 r0 top (schematic designator S1)
S1_7_3 "SW-PB" KEY-3 99.19,60.84 r180 top (schematic designator S1)
S1_8 "SW-PB" KEY-3 111.19,4.84 r180 top (schematic designator S1)
S1_8_1 "SW-PB" KEY-3 24.81,51.16 r0 top (schematic designator S1)
S1_8_2 "SW-PB" KEY-3 24.81,107.16 r0 top (schematic designator S1)
S1_8_3 "SW-PB" KEY-3 111.19,60.84 r180 top (schematic designator S1)
S1_9 "SW-PB" KEY-3 123.19,4.84 r180 top (schematic designator S1)
S1_9_1 "SW-PB" KEY-3 12.81,51.16 r0 top (schematic designator S1)
S1_9_2 "SW-PB" KEY-3 12.81,107.16 r0 top (schematic designator S1)
S1_9_3 "SW-PB" KEY-3 123.19,60.84 r180 top (schematic designator S1)
S1_10 "SW-PB" KEY-3 120.81,51.16 r0 top (schematic designator S1)
S1_11 "SW-PB" KEY-3 120.81,107.16 r0 top (schematic designator S1)
S1_12 "SW-PB" KEY-3 15.19,60.84 r180 top (schematic designator S1)
U1 "STM32L051K8U6" UFQFPN32 14.03,14.71 r0 top
U1_1 "STM32L051K8U6" UFQFPN32 26.03,14.71 r0 top (schematic designator U1)
U1_1_1 "STM32L051K8U6" UFQFPN32 109.97,41.29 r180 top (schematic designator U1)
U1_1_2 "STM32L051K8U6" UFQFPN32 109.97,97.29 r180 top (schematic designator U1)
U1_1_3 "STM32L051K8U6" UFQFPN32 26.03,70.71 r0 top (schematic designator U1)
U1_2 "STM32L051K8U6" UFQFPN32 38.03,14.71 r0 top (schematic designator U1)
U1_2_1 "STM32L051K8U6" UFQFPN32 97.97,41.29 r180 top (schematic designator U1)
U1_2_2 "STM32L051K8U6" UFQFPN32 97.97,97.29 r180 top (schematic designator U1)
U1_2_3 "STM32L051K8U6" UFQFPN32 38.03,70.71 r0 top (schematic designator U1)
U1_3 "STM32L051K8U6" UFQFPN32 50.03,14.71 r0 top (schematic designator U1)
U1_3_1 "STM32L051K8U6" UFQFPN32 85.97,41.29 r180 top (schematic designator U1)
U1_3_2 "STM32L051K8U6" UFQFPN32 85.97,97.29 r180 top (schematic designator U1)
U1_3_3 "STM32L051K8U6" UFQFPN32 50.03,70.71 r0 top (schematic designator U1)
U1_4 "STM32L051K8U6" UFQFPN32 62.03,14.71 r0 top (schematic designator U1)
U1_4_1 "STM32L051K8U6" UFQFPN32 73.97,41.29 r180 top (schematic designator U1)
U1_4_2 "STM32L051K8U6" UFQFPN32 73.97,97.29 r180 top (schematic designator U1)
U1_4_3 "STM32L051K8U6" UFQFPN32 62.03,70.71 r0 top (schematic designator U1)
U1_5 "STM32L051K8U6" UFQFPN32 74.03,14.71 r0 top (schematic designator U1)
U1_5_1 "STM32L051K8U6" UFQFPN32 61.97,41.29 r180 top (schematic designator U1)
U1_5_2 "STM32L051K8U6" UFQFPN32 61.97,97.29 r180 top (schematic designator U1)
U1_5_3 "STM32L051K8U6" UFQFPN32 74.03,70.71 r0 top (schematic designator U1)
U1_6 "STM32L051K8U6" UFQFPN32 86.03,14.71 r0 top (schematic designator U1)
U1_6_1 "STM32L051K8U6" UFQFPN32 49.97,41.29 r180 top (schematic designator U1)
U1_6_2 "STM32L051K8U6" UFQFPN32 49.97,97.29 r180 top (schematic designator U1)
U1_6_3 "STM32L051K8U6" UFQFPN32 86.03,70.71 r0 top (schematic designator U1)
U1_7 "STM32L051K8U6" UFQFPN32 98.03,14.71 r0 top (schematic designator U1)
U1_7_1 "STM32L051K8U6" UFQFPN32 37.97,41.29 r180 top (schematic designator U1)
U1_7_2 "STM32L051K8U6" UFQFPN32 37.97,97.29 r180 top (schematic designator U1)
U1_7_3 "STM32L051K8U6" UFQFPN32 98.03,70.71 r0 top (schematic designator U1)
U1_8 "STM32L051K8U6" UFQFPN32 110.03,14.71 r0 top (schematic designator U1)
U1_8_1 "STM32L051K8U6" UFQFPN32 25.97,41.29 r180 top (schematic designator U1)
U1_8_2 "STM32L051K8U6" UFQFPN32 25.97,97.29 r180 top (schematic designator U1)
U1_8_3 "STM32L051K8U6" UFQFPN32 110.03,70.71 r0 top (schematic designator U1)
U1_9 "STM32L051K8U6" UFQFPN32 122.03,14.71 r0 top (schematic designator U1)
U1_9_1 "STM32L051K8U6" UFQFPN32 13.97,41.29 r180 top (schematic designator U1)
U1_9_2 "STM32L051K8U6" UFQFPN32 13.97,97.29 r180 top (schematic designator U1)
U1_9_3 "STM32L051K8U6" UFQFPN32 122.03,70.71 r0 top (schematic designator U1)
U1_10 "STM32L051K8U6" UFQFPN32 121.97,41.29 r180 top (schematic designator U1)
U1_11 "STM32L051K8U6" UFQFPN32 121.97,97.29 r180 top (schematic designator U1)
U1_12 "STM32L051K8U6" UFQFPN32 14.03,70.71 r0 top (schematic designator U1)
U2 "MIC5205-3.3BM5 (LB33)" SOT23-5 11.11,14.94 r270 top
U2_1 "MIC5205-3.3BM5 (LB33)" SOT23-5 23.11,14.94 r270 top (schematic designator U2)
U2_1_1 "MIC5205-3.3BM5 (LB33)" SOT23-5 112.89,41.06 r90 top (schematic designator U2)
U2_1_2 "MIC5205-3.3BM5 (LB33)" SOT23-5 112.89,97.06 r90 top (schematic designator U2)
U2_1_3 "MIC5205-3.3BM5 (LB33)" SOT23-5 23.11,70.94 r270 top (schematic designator U2)
U2_2 "MIC5205-3.3BM5 (LB33)" SOT23-5 35.11,14.94 r270 top (schematic designator U2)
U2_2_1 "MIC5205-3.3BM5 (LB33)" SOT23-5 100.89,41.06 r90 top (schematic designator U2)
U2_2_2 "MIC5205-3.3BM5 (LB33)" SOT23-5 100.89,97.06 r90 top (schematic designator U2)
U2_2_3 "MIC5205-3.3BM5 (LB33)" SOT23-5 35.11,70.94 r270 top (schematic designator U2)
U2_3 "MIC5205-3.3BM5 (LB33)" SOT23-5 47.11,14.94 r270 top (schematic designator U2)
U2_3_1 "MIC5205-3.3BM5 (LB33)" SOT23-5 88.89,41.06 r90 top (schematic designator U2)
U2_3_2 "MIC5205-3.3BM5 (LB33)" SOT23-5 88.89,97.06 r90 top (schematic designator U2)
U2_3_3 "MIC5205-3.3BM5 (LB33)" SOT23-5 47.11,70.94 r270 top (schematic designator U2)
U2_4 "MIC5205-3.3BM5 (LB33)" SOT23-5 59.11,14.94 r270 top (schematic designator U2)
U2_4_1 "MIC5205-3.3BM5 (LB33)" SOT23-5 76.89,41.06 r90 top (schematic designator U2)
U2_4_2 "MIC5205-3.3BM5 (LB33)" SOT23-5 76.89,97.06 r90 top (schematic designator U2)
U2_4_3 "MIC5205-3.3BM5 (LB33)" SOT23-5 59.11,70.94 r270 top (schematic designator U2)
U2_5 "MIC5205-3.3BM5 (LB33)" SOT23-5 71.11,14.94 r270 top (schematic designator U2)
U2_5_1 "MIC5205-3.3BM5 (LB33)" SOT23-5 64.89,41.06 r90 top (schematic designator U2)
U2_5_2 "MIC5205-3.3BM5 (LB33)" SOT23-5 64.89,97.06 r90 top (schematic designator U2)
U2_5_3 "MIC5205-3.3BM5 (LB33)" SOT23-5 71.11,70.94 r270 top (schematic designator U2)
U2_6 "MIC5205-3.3BM5 (LB33)" SOT23-5 83.11,14.94 r270 top (schematic designator U2)
U2_6_1 "MIC5205-3.3BM5 (LB33)" SOT23-5 52.89,41.06 r90 top (schematic designator U2)
U2_6_2 "MIC5205-3.3BM5 (LB33)" SOT23-5 52.89,97.06 r90 top (schematic designator U2)
U2_6_3 "MIC5205-3.3BM5 (LB33)" SOT23-5 83.11,70.94 r270 top (schematic designator U2)
U2_7 "MIC5205-3.3BM5 (LB33)" SOT23-5 95.11,14.94 r270 top (schematic designator U2)
U2_7_1 "MIC5205-3.3BM5 (LB33)" SOT23-5 40.89,41.06 r90 top (schematic designator U2)
U2_7_2 "MIC5205-3.3BM5 (LB33)" SOT23-5 40.89,97.06 r90 top (schematic designator U2)
U2_7_3 "MIC5205-3.3BM5 (LB33)" SOT23-5 95.11,70.94 r270 top (schematic designator U2)
U2_8 "MIC5205-3.3BM5 (LB33)" SOT23-5 107.11,14.94 r270 top (schematic designator U2)
U2_8_1 "MIC5205-3.3BM5 (LB33)" SOT23-5 28.89,41.06 r90 top (schematic designator U2)
U2_8_2 "MIC5205-3.3BM5 (LB33)" SOT23-5 28.89,97.06 r90 top (schematic designator U2)
U2_8_3 "MIC5205-3.3BM5 (LB33)" SOT23-5 107.11,70.94 r270 top (schematic designator U2)
U2_9 "MIC5205-3.3BM5 (LB33)" SOT23-5 119.11,14.94 r270 top (schematic designator U2)
U2_9_1 "MIC5205-3.3BM5 (LB33)" SOT23-5 16.89,41.06 r90 top (schematic designator U2)
U2_9_2 "MIC5205-3.3BM5 (LB33)" SOT23-5 16.89,97.06 r90 top (schematic designator U2)
U2_9_3 "MIC5205-3.3BM5 (LB33)" SOT23-5 119.11,70.94 r270 top (schematic designator U2)
U2_10 "MIC5205-3.3BM5 (LB33)" SOT23-5 124.89,41.06 r90 top (schematic designator U2)
U2_11 "MIC5205-3.3BM5 (LB33)" SOT23-5 124.89,97.06 r90 top (schematic designator U2)
U2_12 "MIC5205-3.3BM5 (LB33)" SOT23-5 11.11,70.94 r270 top (schematic designator U2)

## Footprints (in the part's own frame and the unit in brackets; to place one, negate y for a bottom-side part, rotate by r counter-clockwise, add the part's x,y. Pads: shape width x height; smd on the part's side, far side on the other; paste and mask are expansions set on the pad)
1608(0603C) [mil]
  rect 30x30 smd: 1(0,0) 2(60,0)
  silkscreen extent -27,-23 87,23
1608(0603R) [mil]
  rect 30x30 smd: 1(0,0) 2(60,0)
  silkscreen extent -24,-23 84,23
1608(0603r) [mil]
  rect 30x30 smd: 1(0,0) 2(60,0)
  silkscreen extent -24,-23 84,23
KEY-3 [mil]
  rect 90x30 smd: 1(0,0)
  oct 90x30 smd: 2(0,-142.89) 3(220,-0.02) 4(220,-142.89)
  silkscreen extent 22,-158 199,15
LED-0603R [mil]
  rect 30x30 smd: A(60,0) K(0,0)
  silkscreen extent -24,-23 84,23
SIPP3X [mm]
  rect 1.5x8 smd: 1(0,0) 2(2.54,0) 3(5.08,0)
SOT23-5 [mm]
  oval 1x0.5 smd: 1(0,0) 2(0,-0.95) 3(0,-1.9) 4(2.8,-1.9) 5(2.8,0)
  silkscreen extent 0.76,-2.21 2.03,0.3
SSSIP8X_N [mm]
  rect 2x0.9 smd: 1(0,0)
  oval 2x0.9 smd: 2(0,-1.27) 3(0,-2.54) 4(0,-3.81) 5(0,-5.08) 6(0,-6.35) 7(0,-7.62) 8(0,-8.89)
UFQFPN32 [mm]
  oct 0.7x0.23 smd: 1(0,0) 2(0,-0.5) 3(0,-1) 4(0,-1.5) 5(0,-2) 6(0,-2.5) 7(0,-3) 8(0,-3.5) 17(4.8,-3.5) 18(4.8,-3) 19(4.8,-2.5) 20(4.8,-2) 21(4.8,-1.5) 22(4.8,-1) 23(4.8,-0.5) 24(4.8,0)
  oct 0.23x0.7 smd: 9(0.65,-4.15) 10(1.15,-4.15) 11(1.65,-4.15) 12(2.15,-4.15) 13(2.65,-4.15) 14(3.15,-4.15) 15(3.65,-4.15) 16(4.15,-4.15) 25(4.15,0.65) 26(3.65,0.65) 27(3.15,0.65) 28(2.65,0.65) 29(2.15,0.65) 30(1.65,0.65) 31(1.15,0.65) 32(0.65,0.65)
  rect 3.4x3.4 smd: 33(2.4,-1.75)
  silkscreen extent -0.64,-4.77 5.49,1.32

## Part data
C1 C1_1 C1_1_1 C1_1_2 C1_1_3 C1_2 C1_2_1 C1_2_2 C1_2_3 C1_3 C1_3_1 C1_3_2 C1_3_3 C1_4 C1_4_1 C1_4_2 C1_4_3 C1_5 C1_5_1 C1_5_2 C1_5_3 C1_6 C1_6_1 C1_6_2 C1_6_3 C1_7 C1_7_1 C1_7_2 C1_7_3 C1_8 C1_8_1 C1_8_2 C1_8_3 C1_9 C1_9_1 C1_9_2 C1_9_3 C1_10 C1_11 C1_12 C2 C2_1 C2_1_1 C2_1_2 C2_1_3 C2_2 C2_2_1 C2_2_2 C2_2_3 C2_3 C2_3_1 C2_3_2 C2_3_3 C2_4 C2_4_1 C2_4_2 C2_4_3 C2_5 C2_5_1 C2_5_2 C2_5_3 C2_6 C2_6_1 C2_6_2 C2_6_3 C2_7 C2_7_1 C2_7_2 C2_7_3 C2_8 C2_8_1 C2_8_2 C2_8_3 C2_9 C2_9_1 C2_9_2 C2_9_3 C2_10 C2_11 C2_12: library part CAP, "Capacitor"
C3 C3_1 C3_1_1 C3_1_2 C3_1_3 C3_2 C3_2_1 C3_2_2 C3_2_3 C3_3 C3_3_1 C3_3_2 C3_3_3 C3_4 C3_4_1 C3_4_2 C3_4_3 C3_5 C3_5_1 C3_5_2 C3_5_3 C3_6 C3_6_1 C3_6_2 C3_6_3 C3_7 C3_7_1 C3_7_2 C3_7_3 C3_8 C3_8_1 C3_8_2 C3_8_3 C3_9 C3_9_1 C3_9_2 C3_9_3 C3_10 C3_11 C3_12: library part Cap, "Capacitor"
D1 D1_1 D1_1_1 D1_1_2 D1_1_3 D1_2 D1_2_1 D1_2_2 D1_2_3 D1_3 D1_3_1 D1_3_2 D1_3_3 D1_4 D1_4_1 D1_4_2 D1_4_3 D1_5 D1_5_1 D1_5_2 D1_5_3 D1_6 D1_6_1 D1_6_2 D1_6_3 D1_7 D1_7_1 D1_7_2 D1_7_3 D1_8 D1_8_1 D1_8_2 D1_8_3 D1_9 D1_9_1 D1_9_2 D1_9_3 D1_10 D1_11 D1_12: library part LED
P1 P1_1 P1_1_1 P1_1_2 P1_1_3 P1_2 P1_2_1 P1_2_2 P1_2_3 P1_3 P1_3_1 P1_3_2 P1_3_3 P1_4 P1_4_1 P1_4_2 P1_4_3 P1_5 P1_5_1 P1_5_2 P1_5_3 P1_6 P1_6_1 P1_6_2 P1_6_3 P1_7 P1_7_1 P1_7_2 P1_7_3 P1_8 P1_8_1 P1_8_2 P1_8_3 P1_9 P1_9_1 P1_9_2 P1_9_3 P1_10 P1_11 P1_12: library part "Header 8", "Header, 8-Pin"
P2 P2_1 P2_1_1 P2_1_2 P2_1_3 P2_2 P2_2_1 P2_2_2 P2_2_3 P2_3 P2_3_1 P2_3_2 P2_3_3 P2_4 P2_4_1 P2_4_2 P2_4_3 P2_5 P2_5_1 P2_5_2 P2_5_3 P2_6 P2_6_1 P2_6_2 P2_6_3 P2_7 P2_7_1 P2_7_2 P2_7_3 P2_8 P2_8_1 P2_8_2 P2_8_3 P2_9 P2_9_1 P2_9_2 P2_9_3 P2_10 P2_11 P2_12 P3 P3_1 P3_1_1 P3_1_2 P3_1_3 P3_2 P3_2_1 P3_2_2 P3_2_3 P3_3 P3_3_1 P3_3_2 P3_3_3 P3_4 P3_4_1 P3_4_2 P3_4_3 P3_5 P3_5_1 P3_5_2 P3_5_3 P3_6 P3_6_1 P3_6_2 P3_6_3 P3_7 P3_7_1 P3_7_2 P3_7_3 P3_8 P3_8_1 P3_8_2 P3_8_3 P3_9 P3_9_1 P3_9_2 P3_9_3 P3_10 P3_11 P3_12: library part "Header 3", "Header, 3-Pin"
R1 R1_1 R1_1_1 R1_1_2 R1_1_3 R1_2 R1_2_1 R1_2_2 R1_2_3 R1_3 R1_3_1 R1_3_2 R1_3_3 R1_4 R1_4_1 R1_4_2 R1_4_3 R1_5 R1_5_1 R1_5_2 R1_5_3 R1_6 R1_6_1 R1_6_2 R1_6_3 R1_7 R1_7_1 R1_7_2 R1_7_3 R1_8 R1_8_1 R1_8_2 R1_8_3 R1_9 R1_9_1 R1_9_2 R1_9_3 R1_10 R1_11 R1_12 R2 R2_1 R2_1_1 R2_1_2 R2_1_3 R2_2 R2_2_1 R2_2_2 R2_2_3 R2_3 R2_3_1 R2_3_2 R2_3_3 R2_4 R2_4_1 R2_4_2 R2_4_3 R2_5 R2_5_1 R2_5_2 R2_5_3 R2_6 R2_6_1 R2_6_2 R2_6_3 R2_7 R2_7_1 R2_7_2 R2_7_3 R2_8 R2_8_1 R2_8_2 R2_8_3 R2_9 R2_9_1 R2_9_2 R2_9_3 R2_10 R2_11 R2_12 R3 R3_1 R3_1_1 R3_1_2 R3_1_3 R3_2 R3_2_1 R3_2_2 R3_2_3 R3_3 R3_3_1 R3_3_2 R3_3_3 R3_4 R3_4_1 R3_4_2 R3_4_3 R3_5 R3_5_1 R3_5_2 R3_5_3 R3_6 R3_6_1 R3_6_2 R3_6_3 R3_7 R3_7_1 R3_7_2 R3_7_3 R3_8 R3_8_1 R3_8_2 R3_8_3 R3_9 R3_9_1 R3_9_2 R3_9_3 R3_10 R3_11 R3_12: library part Res2, "Resistor"
S1 S1_1 S1_1_1 S1_1_2 S1_1_3 S1_2 S1_2_1 S1_2_2 S1_2_3 S1_3 S1_3_1 S1_3_2 S1_3_3 S1_4 S1_4_1 S1_4_2 S1_4_3 S1_5 S1_5_1 S1_5_2 S1_5_3 S1_6 S1_6_1 S1_6_2 S1_6_3 S1_7 S1_7_1 S1_7_2 S1_7_3 S1_8 S1_8_1 S1_8_2 S1_8_3 S1_9 S1_9_1 S1_9_2 S1_9_3 S1_10 S1_11 S1_12: "Switch"
U2 U2_1 U2_1_1 U2_1_2 U2_1_3 U2_2 U2_2_1 U2_2_2 U2_2_3 U2_3 U2_3_1 U2_3_2 U2_3_3 U2_4 U2_4_1 U2_4_2 U2_4_3 U2_5 U2_5_1 U2_5_2 U2_5_3 U2_6 U2_6_1 U2_6_2 U2_6_3 U2_7 U2_7_1 U2_7_2 U2_7_3 U2_8 U2_8_1 U2_8_2 U2_8_3 U2_9 U2_9_1 U2_9_2 U2_9_3 U2_10 U2_11 U2_12: library part MIC5205

## Free pads (board coordinates)
  round 1 smd mask+1: ""(2.6,12.25) ""(2.6,99.75) ""(133.4,12.25) ""(133.4,99.75)

## Via types
v1: diameter 0.4, hole 0.2, TopLayer to BottomLayer, tented both sides, 1040 vias